# EAGLE board microphone (EAGLE 6.6.0)

Size 100 x 80 mm. Coordinates in mm from the lower left corner, seen from the top.
Outline: 0,0 100,0 100,80 0,80 0,0
Copper layers (1*16): Top 0.035mm / dielectric 1.5mm / Bottom 0.035mm
Design rules "default": minimum track width 10mil, minimum drill 24mil, track to track 8mil, track to pad 8mil, pad to pad 8mil, via to via 8mil, smd to smd 8mil, copper to edge 40mil, drill to drill 8mil, minimum pad ring 10mil, minimum via ring 8mil, stop-mask expansion 4mil, vias tented up to drill 0mil, thermal gap 10mil

## Footprints (pad centres in the part's own frame; a part is rotated, then mirrored left to right if it is on the bottom)
R1206FAB = smd 1.27 x 1.905: 1 -1.651,0; 2 1.651,0
C1206FAB = smd 1.27 x 1.905: 1 -1.651,0; 2 1.651,0
SOT23-5 = smd 0.533 x 1.194: 1 -0.95,-1.306; 2 0,-1.306; 3 0.95,-1.306; 4 0.95,1.306; 5 -0.95,1.306
SOIC8 = smd 0.5 x 2.2: 1 -1.905,-3.154; 2 -0.645,-3.154; 3 0.625,-3.154; 4 1.895,-3.154; 5 1.905,3.154; 6 0.635,3.154; 7 -0.635,3.154; 8 -1.905,3.154
1X06SMD = smd 2.54 x 1.27: 1 0,6.35; 2 0,3.81; 3 0,1.27; 4 0,-1.27; 5 0,-3.81; 6 0,-6.35
2X03SMD = smd 2.54 x 1.27: 1 -2.54,2.54; 2 2.92,2.54; 3 -2.54,0; 4 2.92,0; 5 -2.54,-2.54; 6 2.92,-2.54
ELECTRET_2742PBJ-A = smd 1.016 x 1.905: P$1 -0.953,0; P$2 0.953,0

## Placement (x,y rotation side)
0Ω  [R1206FAB]  40.64,67.31 270 top
C1  [C1206FAB]  -39.37,16.51 0 top  (outside the outline)
C2  [C1206FAB]  73.66,58.42 270 top
C3  [C1206FAB]  68.58,69.85 270 top
IC1  OPAMPSOT23-5  [SOT23-5]  54.61,67.31 90 top
R1  [R1206FAB]  46.99,67.31 90 top
R2  [R1206FAB]  36.83,67.31 270 top
R3  [R1206FAB]  43.18,67.31 270 top
R4  [R1206FAB]  69.85,58.42 270 top
R5  [R1206FAB]  -20.32,33.02 0 top  (outside the outline)
R7  [R1206FAB]  64.77,69.85 90 top
R8  [R1206FAB]  60.96,69.85 270 top
U$1  ATTINY45SI  [SOIC8]  58.42,59.69 180 top
U$2  FTDI-SMD-HEADER  [1X06SMD]  81.28,62.23 0 top
U$4  AVRISPSMD  [2X03SMD]  46.99,54.61 180 top
U$5  ELECTRET  [ELECTRET_2742PBJ-A]  -20.32,36.83 0 top  (outside the outline)

## Library data of the parts
0Ω C1-C3 IC1 R1-R5 R7 R8 U$1 U$2 U$4 U$5 = fab

## Nets
C1: 0Ω.2
G: 0Ω.1 C2.1 C3.2 U$2.1
GND: U$1.4 U$4.6
MISO: U$1.6 U$4.1
MOSI: U$1.5 U$4.4
N$1: R7.2 R8.1
N$2: R1.2 R3.1
N$4: U$2.6
N$5: U$2.4
N$6: C1.2 R3.2
N$7: C1.1
PB3: R8.2 U$1.2
PB4: R1.1 U$1.3
PB5: U$1.1 U$4.5
SCK: U$1.7 U$2.5 U$4.3
V+: IC1.5
V-: IC1.2
VCC: C2.2 C3.1 R2.1 R4.2 R7.1 U$1.8 U$2.3 U$4.2

## Tracks (layer width: path | path; a pad name or v marks a point on that pad's centre or on a via)
G  (3 unrouted)
GND  (1 unrouted)
MISO  (1 unrouted)
MOSI  (1 unrouted)
N$1  (1 unrouted)
N$2  (1 unrouted)
N$6  (1 unrouted)
PB3  (1 unrouted)
PB4  (1 unrouted)
PB5  (1 unrouted)
SCK  (2 unrouted)
VCC  (7 unrouted)